# Altium PCB tuch-tara-smd.PcbDoc
Units mm, origin at the board's own origin, x right, y up, seen from the top; angles counter-clockwise.
Board outline 151 x 86.38 mm, 2 copper layers (Top Layer, Bottom Layer); 14 components, 20 nets, 37 pads, 0 vias.
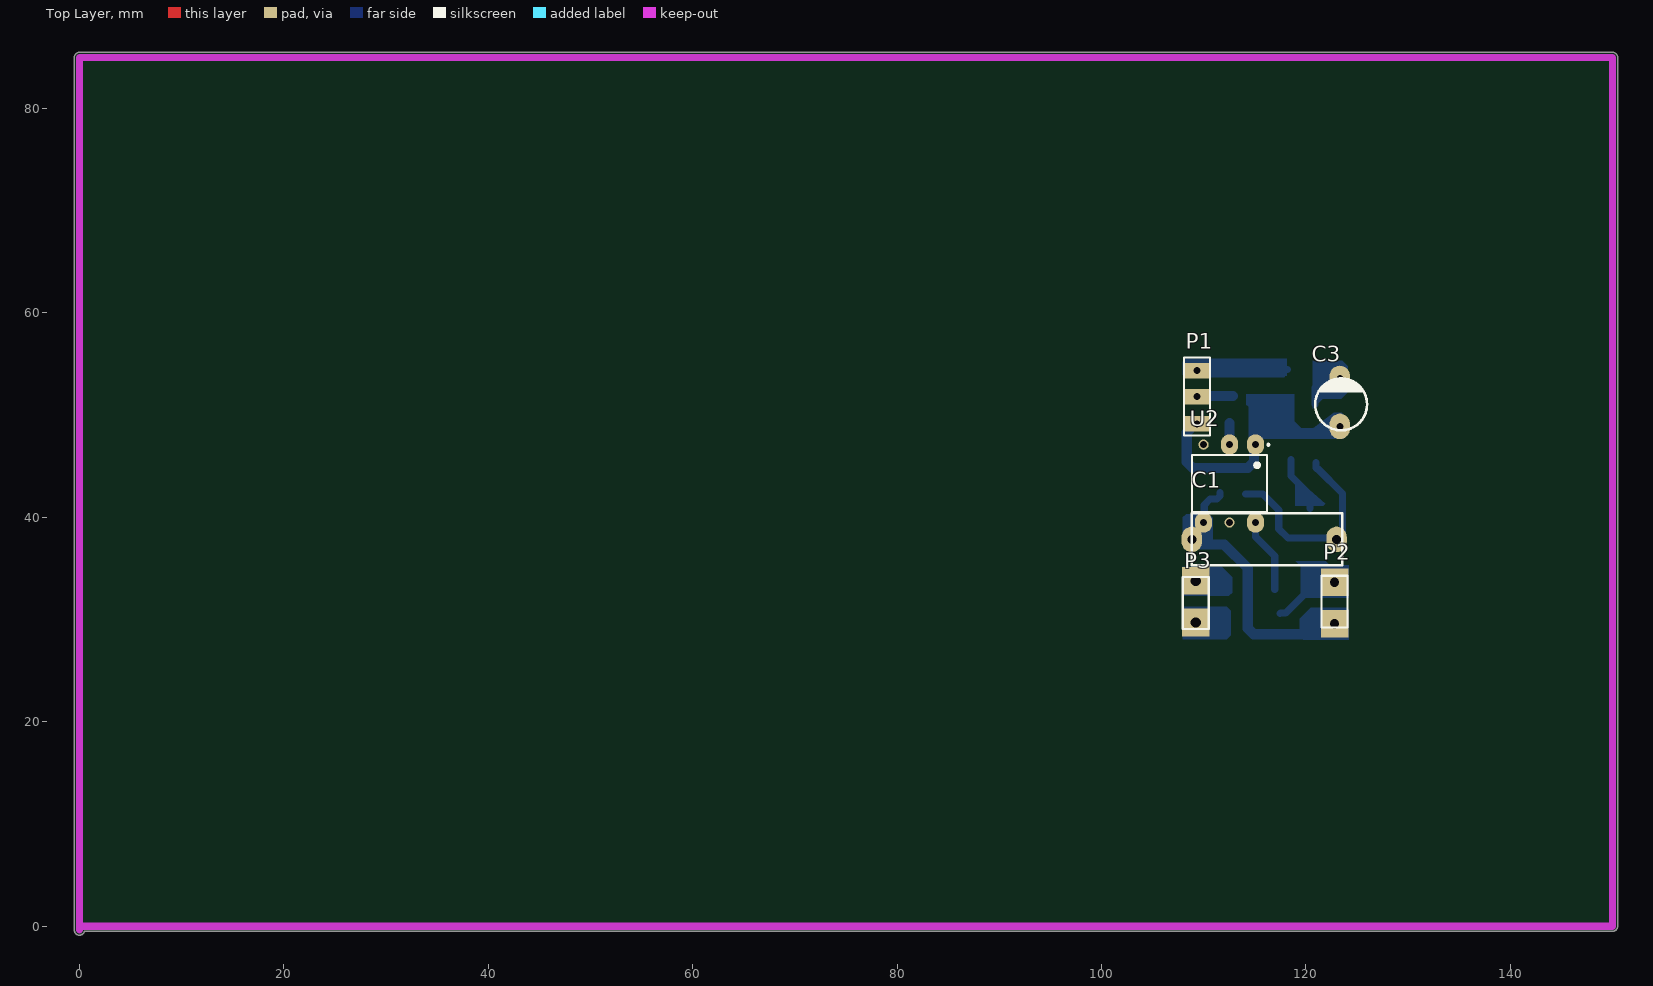
[diagram p0: Top Layer view]
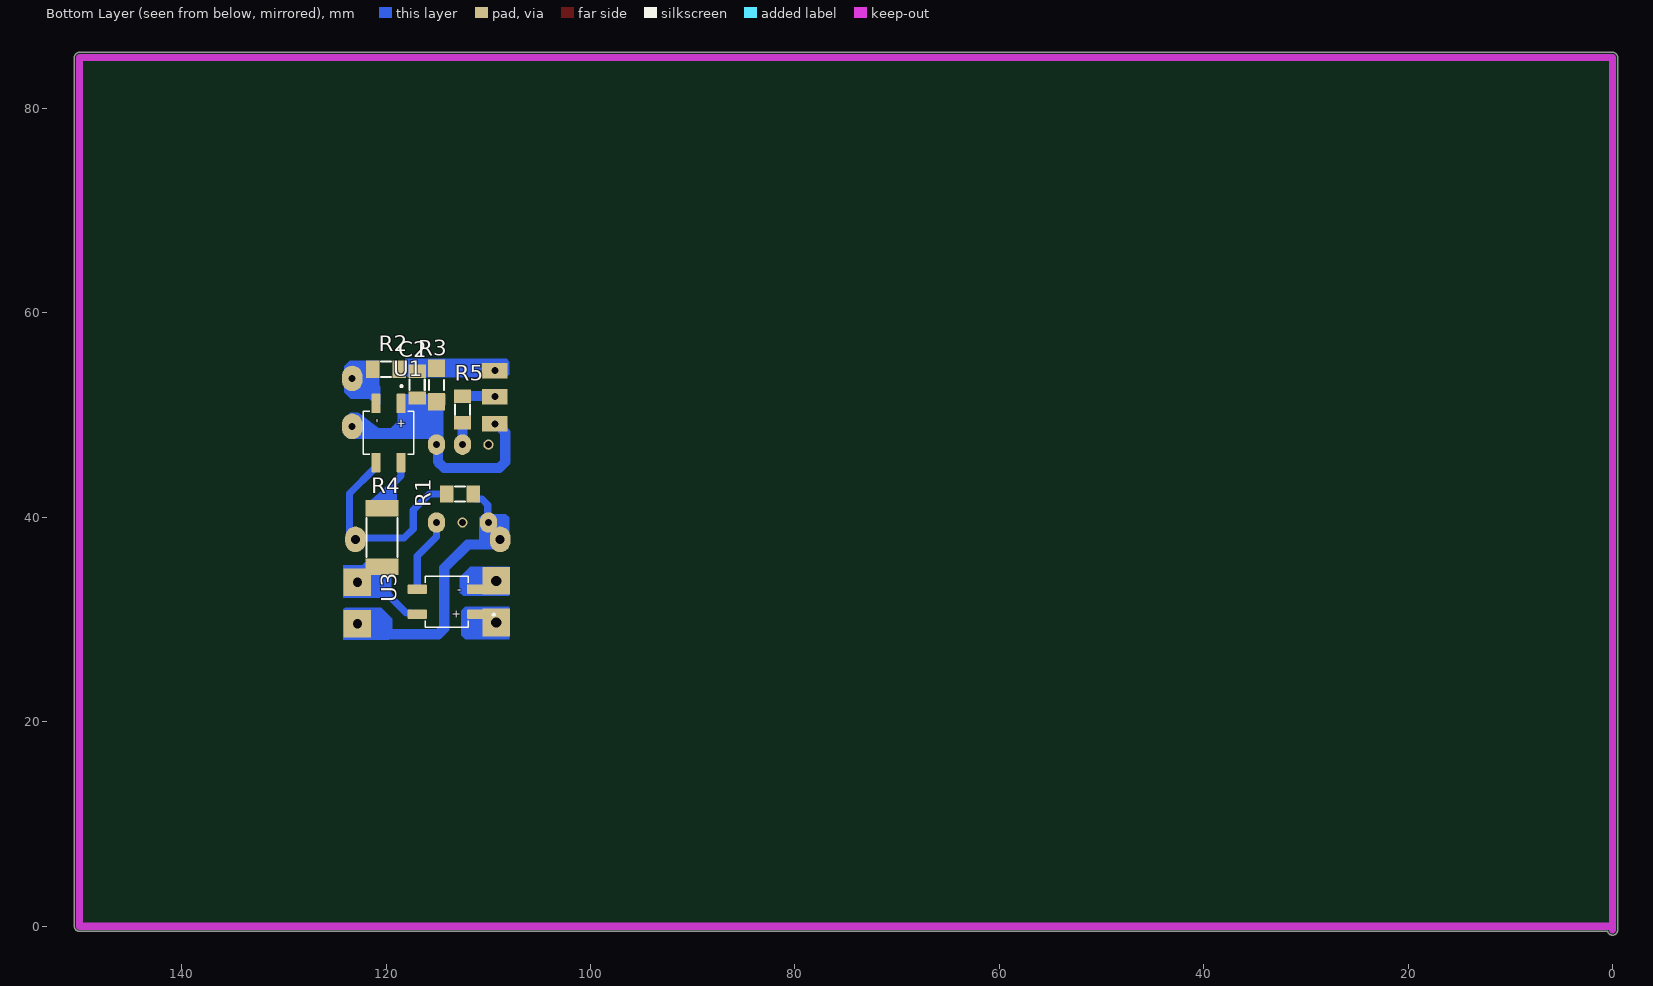
[diagram p1: Bottom Layer view, seen from below]
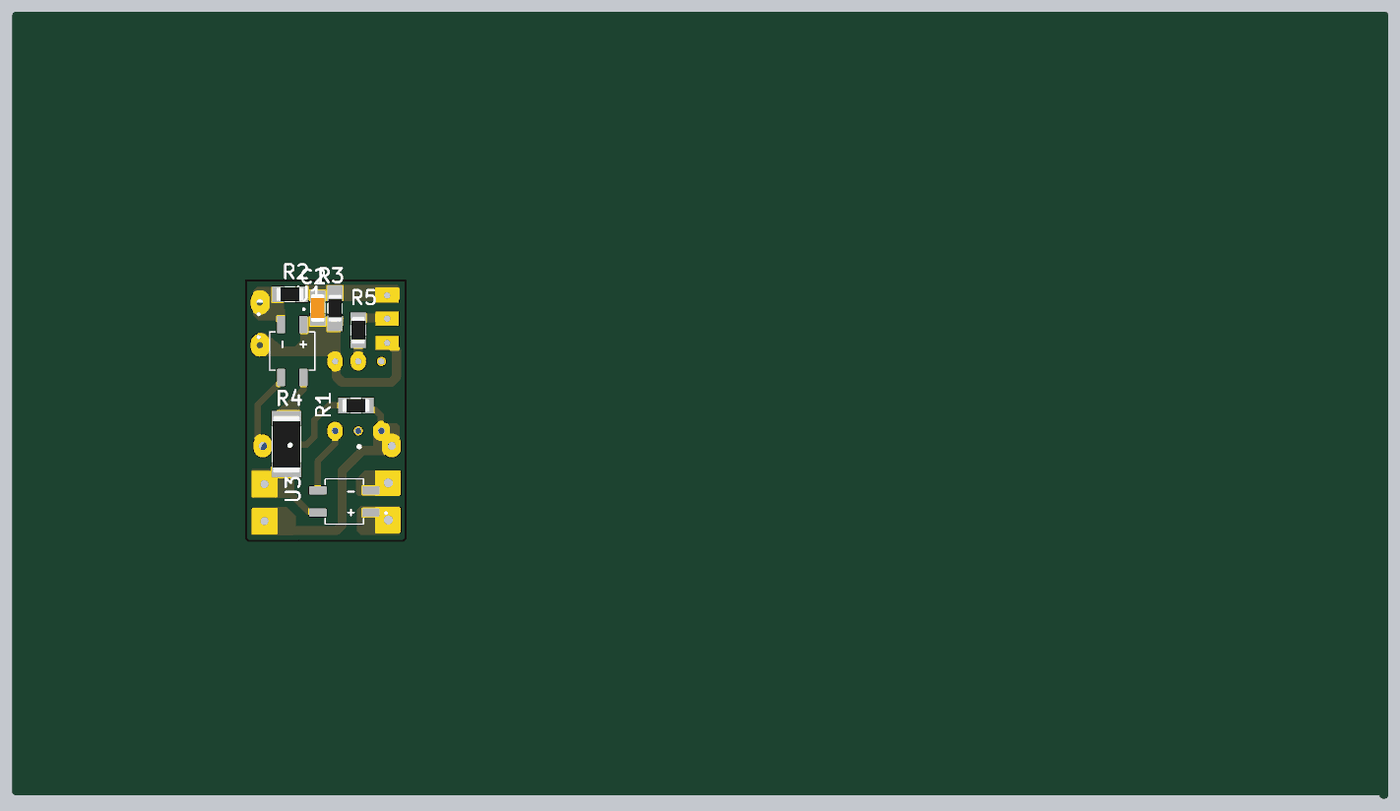
[diagram p2: 3D render of the assembled board from below, using the file's embedded part models]

## Layer stack, top to bottom
Top Solder: solder mask 0.0102, Solder Resist, Dk 3.5
Top Layer: signal copper 0.0356
Dielectric 1: dielectric 0.32, FR-4, Dk 4.8
Bottom Layer: signal copper 0.0356
Bottom Solder: solder mask 0.0102, Solder Resist, Dk 3.5

## Board outline
-0.5,-0.381 -0.5,85 cw(c0,85) 0,85.5 150,85.5 cw(c150,85) 150.5,85 150.5,0 cw(c150,0) 150,-0.5 0.486,-0.5 cw(c0,-0.381)

## Design rules (kind name [scope] priority, off if disabled: settings)
Clearance Clearance_1 [InPolygon] p1: gap=0.8 ignorepadtopadclearanceinfootprint=FALSE
Clearance [All] p2: gap=0.254 ignorepadtopadclearanceinfootprint=FALSE except(0: Arc-Hole Track-Hole SMDPad-Hole THPad-Hole Via-Hole Fill-Hole Poly-Hole Region-Hole Text-Hole)
PolygonConnect [All] p1: connectstyle=Relief reliefconductorwidth=0.254 reliefentries=4 polygonreliefangle="90 Angle" airgapwidth=0.254
RoomDefinition tuch-tara2 [InComponentClass('tuch-tara2')] p1: confinementstyle=ConfineIn formatcopy=TRUE lockcomponents=FALSE outline 144.907,-4.953 247.904,-4.953 247.904,23.114 144.907,23.114
RoutingLayers [All] p1: top layer_v5=FALSE bottom layer_v5=TRUE
RoutingVias [All] p1: holewidth=0.711 width=2.5 viastyle="Through Hole" minholewidth=0.711 minwidth=1.27 maxholewidth=0.711 maxwidth=2
SolderMaskExpansion [All] p1: expansion=0.102 istentingtop=FALSE
Width [All] p1: maxlimit=3 minlimit=0.5 preferedwidth=1
29 further rules are at their usual default settings.

## Components (designator, comment, footprint, x,y, rotation, side; value= is the part's Value field where it differs from the comment)
C1 "=Value" CAP-30 116.205,37.846 r0 top
C2 "=Value" "CAP 1206" 116.967,52.959 r90 bottom
C3 "=Value" ELEC-CAP-RAD10-20 123.444,51.054 r270 top
P1 "Header 3" HDR1X3 109.347,54.356 r270 top
P2 "Header 2" HDR1X2#1 122.809,33.02 r270 top
P3 "Header 2" HDR1X2#2 109.22,32.893 r270 top
R1 "10K" "RES 1206 (3216X08L)"#1 112.776,42.291 r180 bottom
R2 "10K" "RES 1206 (3216X08L)"#1 120.015,54.483 r180 bottom
R3 "10K" "RES 1206 (3216X08L)"#2 115.062,52.959 r90 bottom
R4 "10K" "RES 2512 (6331X07L)" 120.396,38.029 r270 bottom
R5 "10K" "RES 1206 (3216X08L)"#1 112.522,50.546 r270 bottom
U1 "MB6S" SOIC245P670X270-4N 119.761,48.26 r270 bottom
U2 "K3021P" DIP762W50P254L730H410Q6 112.522,43.307 r270 top
U3 "MB6S" SOIC245P670X270-4N 114.046,31.75 r0 bottom

## Footprints (in the part's own frame and the unit in brackets; to place one, negate y for a bottom-side part, rotate by r counter-clockwise, add the part's x,y. Pads: shape width x height; smd on the part's side, far side on the other; paste and mask are expansions set on the pad)
"CAP 1206" [mm]
  rect 1.3x1.7 smd: 1(-1.27,0) 2(1.326,0)
  silkscreen extent -0.47,-0.75 0.53,0.75, body extent -1.49,-0.77 1.55,0.75, height 0.75
CAP-30 [mm]
  oval 2x2.5 hole 0.9: 1(-7.366,0) 2(6.795,0)
  silkscreen extent -7.37,-2.54 7.37,2.54, body extent -7.65,-4.29 7.65,4.29, height 17.96
DIP762W50P254L730H410Q6 [mm]
  oval 2x1.7 hole 0.7: 1(-3.81,2.54) 2(-3.81,0) 4(3.81,-2.54) 6(3.81,2.54)
  round 1 hole 0.7: 3(-3.81,-2.54) 5(3.81,0)
  silkscreen extent -3.9,-3.65 2.8,3.9
ELEC-CAP-RAD10-20 [mm]
  oval 2.5x2 hole 0.7: 1(-2.54,-0.127) 2(2.15,-0.127)
  silkscreen extent -2.54,-2.54 2.54,2.54, body extent -3.15,-3.15 3.15,3.15, height 10.26
HDR1X2#1 [mm] "Connector; Header; 2 Position"
  rect 2.7x2.7 hole 0.9: 1(-0.635,0) 2(3.429,0)
  silkscreen extent -1.27,-1.27 3.81,1.27
HDR1X2#2 [mm] "Connector; Header; 2 Position"
  rect 2.7x2.7 hole 1: 1(-0.889,0) 2(3.175,0)
  silkscreen extent -1.27,-1.27 3.81,1.27
HDR1X3 [mm] "Connector; Header; 3 Position"
  rect 1.524x2.5 hole 0.7: 1(0,0) 2(2.54,0) 3(5.207,0)
  silkscreen extent -1.27,-1.27 6.35,1.27
"RES 1206 (3216X08L)"#1 [mm] "Chip Resistor, 2-Leads, Body 3.2x1.6mm, IPC High Density _ (0.125 W)"
  rect 1.3x1.7 smd: 1(-1.295,0) 2(1.301,0)
  silkscreen extent -0.5,-0.75 0.5,0.75, body extent -1.52,-0.76 1.53,0.76, height 0.6
"RES 1206 (3216X08L)"#2 [mm] "Chip Resistor, 2-Leads, Body 3.2x1.6mm, IPC High Density _ (0.125 W)"
  rect 1.7x1.7 smd: 1(-1.659,0) 2(1.641,0)
  silkscreen extent -0.5,-0.75 0.5,0.75, body extent -1.52,-0.76 1.53,0.76, height 0.6
"RES 2512 (6331X07L)" [mm] "Chip Resistor, 2-Leads, Body 6.3x3.1mm, IPC High Density _ (0.500 W)"
  rect 1.6x3.2 smd: 1(-2.85,0) 2(2.85,0)
  silkscreen extent -1.9,-1.5 1.9,1.5, body extent -3.18,-1.52 3.17,1.52, height 0.6
SOIC245P670X270-4N [mm]
  rrect23% 1.91x0.91 smd: 1(-2.9,1.225) 2(-2.9,-1.225) 3(2.9,-1.225) 4(2.9,1.225)
  silkscreen extent -4.68,-2.48 2.1,2.48

## Part data
C1 C2: library part Capacitor, "Capacitor"
C3: library part "Capacitor Electrolytic", "Electrolytic Capacitor"
P1: "Header, 3-Pin", LatestRevisionDate=17-Jul-2002, LatestRevisionNote="Re-released for DXP Platform.", Publisher="Altium Limited"
P2 P3: "Header, 2-Pin", LatestRevisionDate=17-Jul-2002, LatestRevisionNote="Re-released for DXP Platform.", Publisher="Altium Limited"
R1 R2 R3 R4 R5: library part Resistor, "Resistor", Power="1/4 W", Tolerance=5%
U1 U3: "Bridge Rectifier Single Phase Standard 600V Surface Mount 4-SOIC", Package="BESOP-4 Surge Components", Digi-Key_Part_Number=MB6SCT-ND, Digi-Key_Purchase_URL=https://www.digikey.com.tr/product-detail/en/on-semiconductor/MB6S/MB6SCT-ND/965654?utm_source=snapeda&utm_medium=aggregator&utm_campaign=symbol, MF="ON Semiconductor", MP=MB6S, SnapEDA_Link=https://www.snapeda.com/parts/MB6S/ON%20Semiconductor/view-part/2774209/?ref=snap
U2: "Optoisolator Triac Output 5300Vrms 1 Channel 6-DIP", Package="DIP-6 Vishay", Availability=Unavailable, DigiKey-Purchase-URL=https://snapeda.com/shop?store=DigiKey&id=291595, MF="Vishay Semiconductor", Mouser-Purchase-URL=https://snapeda.com/shop?store=Mouser&id=291595, MP=K3021P, Price=None, SnapEDA_Link=https://www.snapeda.com/parts/K3021P/Vishay%20Semiconductor%20Opto%20Division/view-part/291595/?ref=snap

## Nets (pads, with @x,y where several pads share a name; then routed paths per layer and width w, separated by ;. In a path a pad name is that pad's centre, name@x,y a point inside that pad or via, vN(x,y) a via of type N, cw(c..) or ccw(c..) an arc to the next point about the centre after c; other vN are vias at no path point)
faz: C1.1 P2.2 R1.2 U2.4 | length 28.5
  Bottom Layer w0.7: C1.1 109.165,37.846 C1.1@109.673,37.338 ; C1.1@108.861,37.957 108.861,38.336 109.601,39.076 U2.4@109.601,39.497 ; U2.4 110.05,39.565 110.05,41.216 110.625,41.791 111.3,41.791 111.602,42.093 R1.2@111.602,42.418
  Bottom Layer w1: C1.1@109.673,37.338 112.014,37.338 114.3,35.052 114.3,29.161 114.886,28.575 121.723,28.575 121.889,28.741 122.309,28.741 122.809,29.241 P2.2 ; P2.2@122.809,28.956 P2.2@123.571,28.956
GND: C2.2 P1.1 R2.2 R3.2 | length 4.6
  Bottom Layer w0.7: P1.1@109.22,54.61 112.395,54.61 ; C2.2@116.734,54.483 R2.2@118.206,54.483
NetC1_2: C1.2 R1.1 U1.3 | length 21
  Bottom Layer w0.7: R1.1 115.778,42.291 117.348,40.721 117.348,38.862 118.237,37.973 123.444,37.973 123.571,37.846 123.571,42.333 121.149,44.755 121.091,44.755 120.986,44.86 U1.3
NetC3_1: C3.1 R2.1 U1.2 | length 4.3
  Bottom Layer w0.7: U1.2@120.904,51.034 120.904,52.705 121.68,53.481 123.077,53.481 C3.1@123.19,53.594
NetC4_1: R5.2 U2.2 | length 2.1
  Bottom Layer w1: U2.2 R5.2
NetC5_2: 
NetC6_1: 
NetC7_1: 
NetJ1_14: 
NetP4_1: 
NetQ1_2: 
NetR4_1: R4.1 U1.4 | length 5.6
  Bottom Layer w0.7: U1.4@118.536,45.672 118.536,44.037 120.396,42.177 R4.1
NetR8_1: 
NetR10_1: 
NetU2_6: U2.6 U3.3 | length 7.3
  Bottom Layer w0.7: U2.6 115.082,39.477 115.082,38.08 116.946,36.216 U3.3
nol: P2.1 R4.2 U3.4 | length 7.5
  Bottom Layer w0.7: U3.4@117.475,30.607 117.498,30.63 118.006,30.63 120.777,33.401 P2.1@123.82,33.401
o1: P1.2 R5.1 | length 3.5
  Bottom Layer w1: P1.2 109.417,51.886 112.153,51.886 112.172,51.866 R5.1@112.857,51.866
o2: P3.2 U3.1
oo1: P3.1 U3.2
VCC: C2.1 C3.2 P1.3 R3.1 U1.1 U2.1 | length 29.9
  Bottom Layer w0.7: U2.1@114.935,47.143 114.935,47.409 115.33,47.804 115.33,48.02 117.094,49.784 ; U2.1@115.062,46.863 U2.1@115.57,47.371 ; 117.901,51.033 115.467,51.033 115.057,50.623 115.057,50.043 115.062,50.038 116.831,50.038 116.835,50.042 117.094,50.042 117.598,50.042 119.253,48.387 C3.2@123.19,48.387
  Bottom Layer w1: P1.3 108.859,49.149 108.597,48.887 108.597,48.567 108.331,48.301 108.331,45.417 108.917,44.831 114.3,44.831 114.928,45.459 114.928,46.983 U2.1
pads on no net: U2.3 U2.5

## Polygon pours and split planes (outlines as drawn)
GND on Bottom Layer "GND_L02_P002" (solid, pour order 2): 116.332,39.751
no net on Bottom Layer "NONET_L02_P000" (solid, pour order 0): 91.059,37.973

## Keep-outs
Keep-Out Layer:
  lines w0.7: 0,-0.381 0,85 150,85 150,0 0,0

## Other copper
Bottom Layer:
  region net faz: 110.744,40.02 110.744,37.582 108.432,37.618 107.932,38.118
  region net NetR4_1: 118.948,43.329 119.133,43.736 121.913,41.354 121.678,41.119 118.948,41.119
  region net nol: 119.888,32.258 119.888,34.925 119.761,34.925 118.999,35.687 121.92,35.687 123.063,34.544 120.777,32.258 120.777,32.131
  region net faz: 120.46,31.178 119.38,30.099 119.38,28.385 119.761,28.004 124.206,28.004 124.206,30.988 124.015,31.179
  region net faz: 107.95,37.592 107.95,40.005 108.268,40.323 110.49,40.322 110.871,39.941 110.871,37.592
  region net oo1: 107.95,35.179 111.76,35.179 112.776,34.163 112.776,32.639 112.458,32.322 108.013,32.322 107.95,32.385
  region net o2: 112.649,30.861 112.268,31.242 107.95,31.242 107.95,28.067 112.268,28.067 112.649,28.448
  region net nol: 124.206,35.306 119.507,35.306 119.507,32.131 124.206,32.131
  region net VCC: 120.142,48.26 122.745,50.228 123.507,50.228 123.888,49.847 123.888,47.942 123.634,47.688 119.951,47.688
  region net NetC3_1: 120.65,55.308 123.571,55.308 124.079,54.8 124.079,52.261 123.444,51.625 121.666,51.625 120.65,50.609
  region net VCC: 118.872,52.07 114.173,52.07 114.173,51.015 114.427,50.839 114.427,46.901 115.215,47.688 120.586,47.688 118.872,49.403
  region net GND: 118.11,55.499 108.204,55.499 107.95,55.245 107.95,53.975 108.077,53.848 109.982,53.848 110.109,53.721 117.856,53.721 117.983,53.848 118.11,53.848
  region: 123.444,44.45

## Silkscreen, mask and mechanical layers (free items; w line width, h text height)
Bottom Solder:
  lines w0.2: 107.315,27.686 107.315,56.007 124.841,56.007 124.841,27.686 124.587,27.432 107.569,27.432 107.315,27.686

## Text inside footprints (layer, text, board x,y; h text height)
U1: Bottom Overlay "+" at 118.871,49.659 h0.81 r90; Bottom Overlay "-" at 121.161,49.66 h0.81 r90
U3: Bottom Overlay "-" at 112.646,33.15 h0.81 r180; Bottom Overlay "+" at 112.647,30.86 h0.81 r180